# EAGLE board barebones_arduino (EAGLE 5.06)
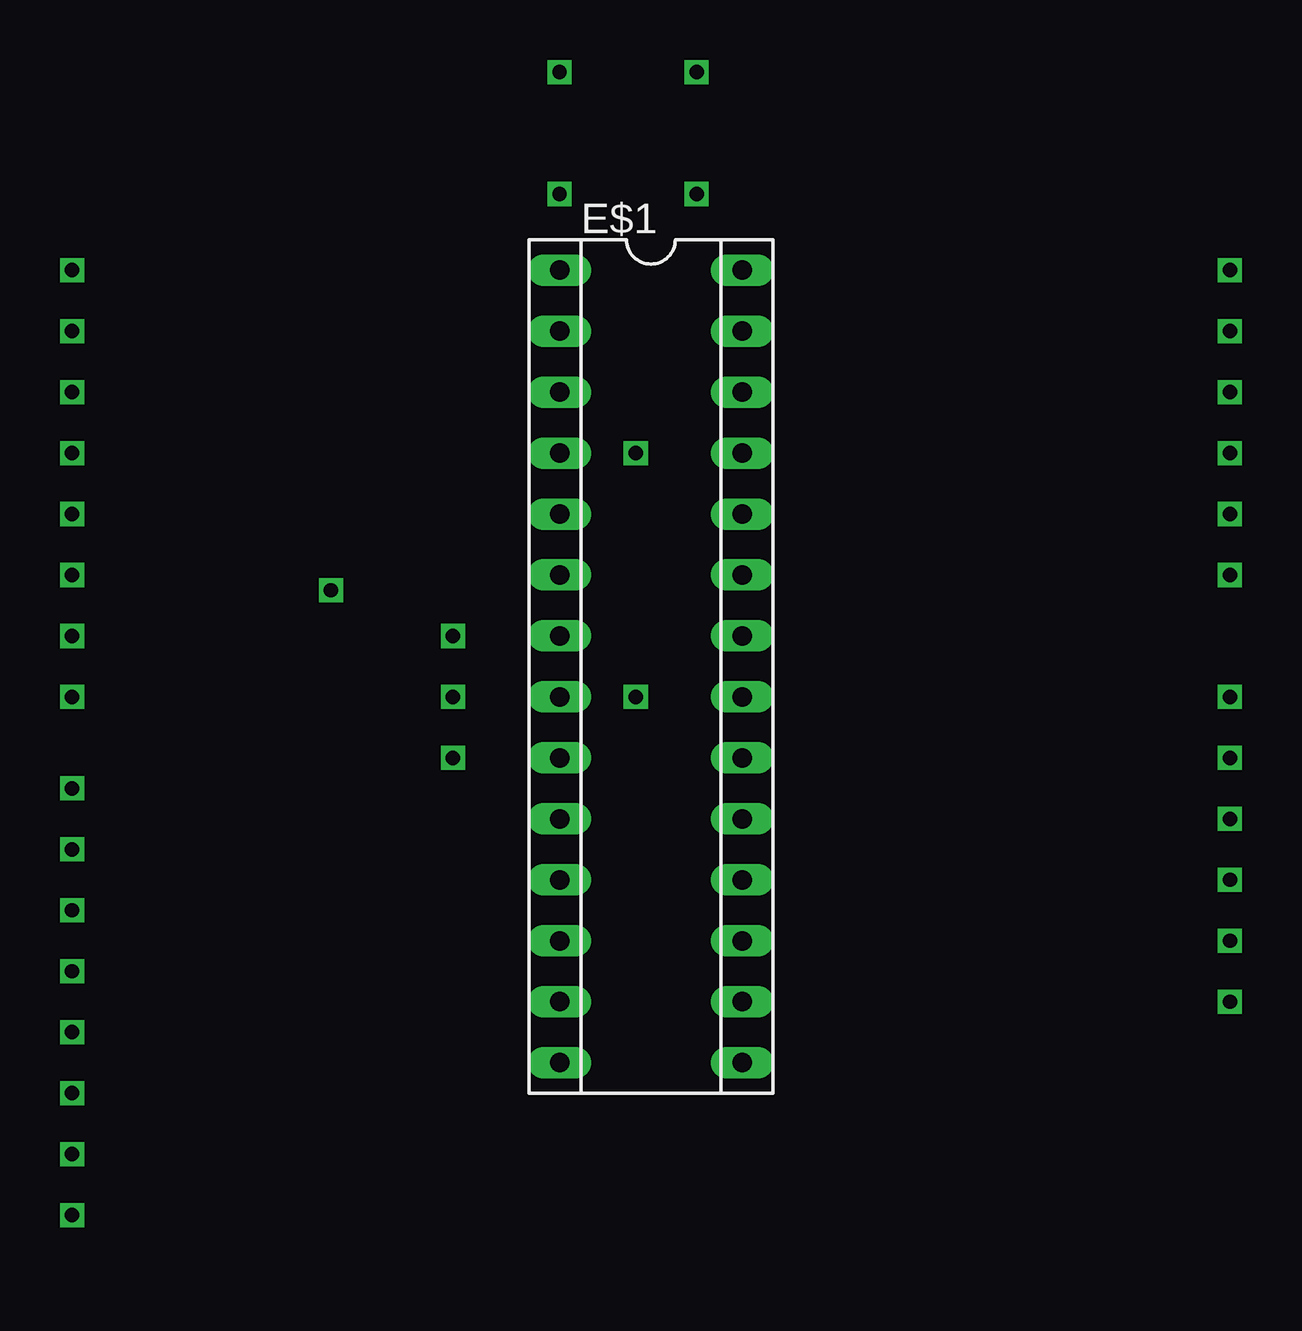
[diagram p0: board, top side]
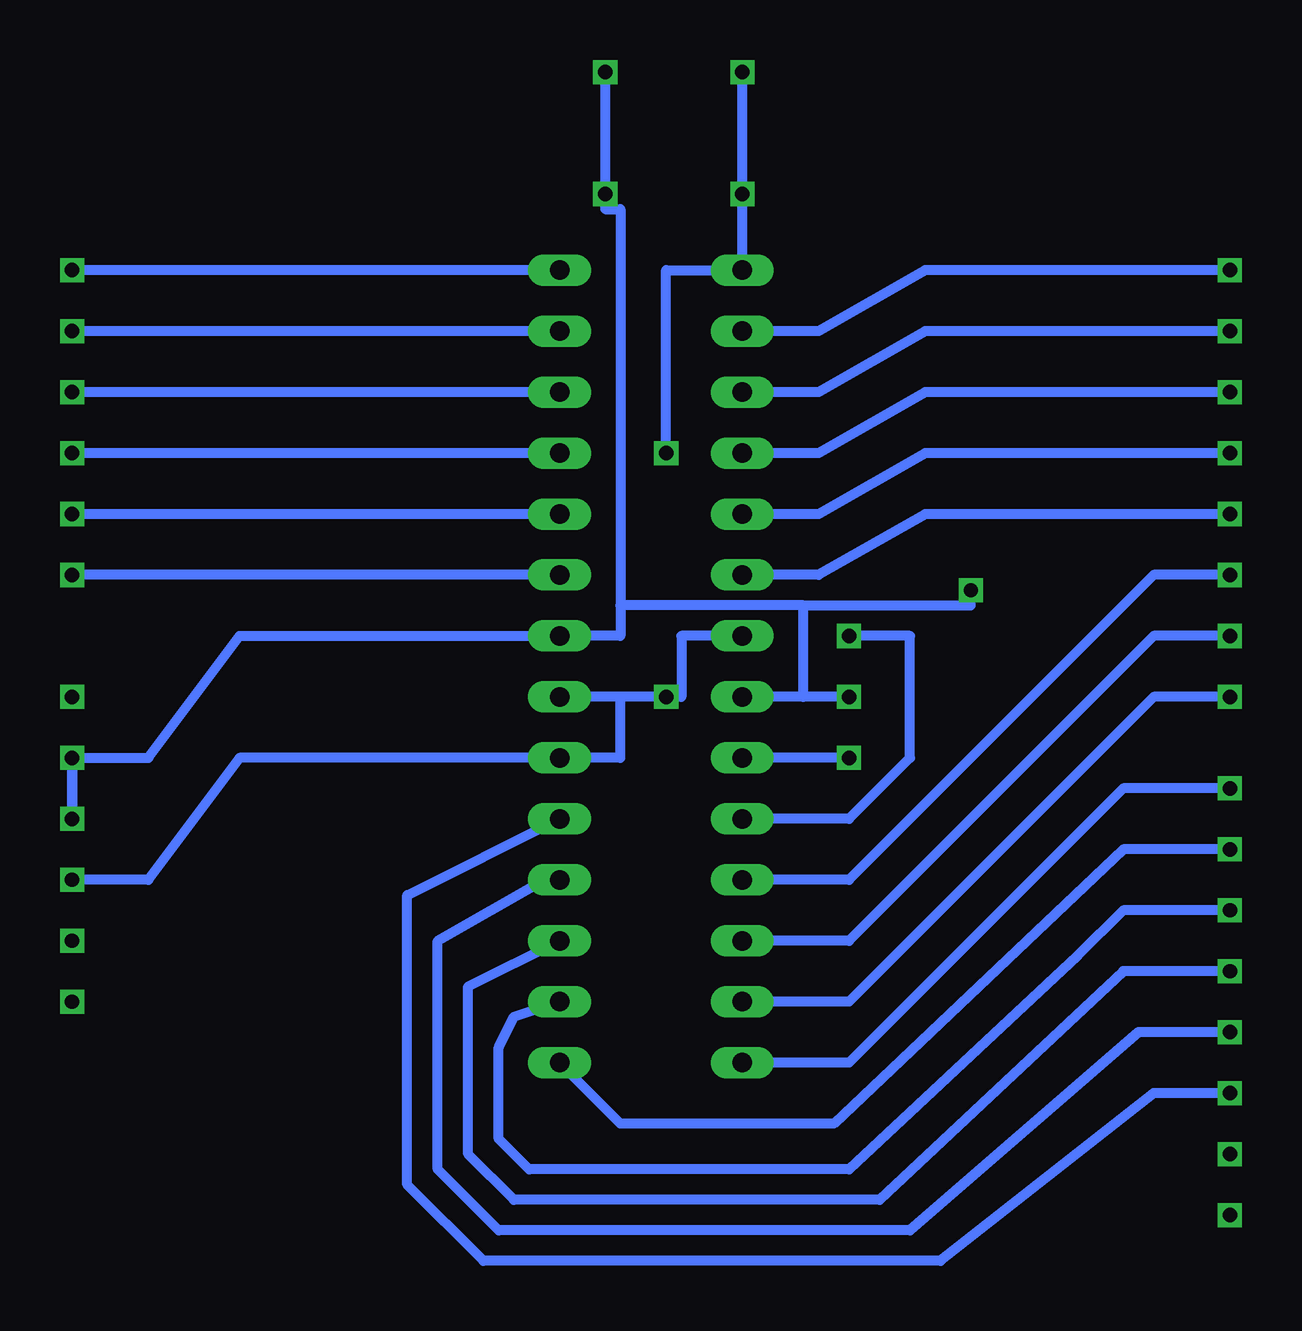
[diagram p1: board, bottom side, seen from below]

No outline drawn. Coordinates in mm, seen from the top.
Copper layers (1*16): Top 0.035mm / dielectric 1.5mm / Bottom 0.035mm
Design rules "default": minimum track width 10mil, minimum drill 24mil, track to track 8mil, track to pad 8mil, pad to pad 8mil, via to via 8mil, smd to smd 8mil, copper to edge 40mil, drill to drill 8mil, minimum pad ring 10mil, minimum via ring 8mil, stop-mask expansion 4mil, vias tented up to drill 0mil, thermal gap 10mil

## Footprints (pad centres in the part's own frame; a part is rotated, then mirrored left to right if it is on the bottom)
SOCKET-28-3 = drill 0.813 long: 1 -16.51,-3.81; 2 -13.97,-3.81; 3 -11.43,-3.81; 4 -8.89,-3.81; 5 -6.35,-3.81; 6 -3.81,-3.81; 7 -1.27,-3.81; 8 1.27,-3.81; 9 3.81,-3.81; 10 6.35,-3.81; 11 8.89,-3.81; 12 11.43,-3.81; 13 13.97,-3.81; 14 16.51,-3.81; 15 16.51,3.81; 16 13.97,3.81; 17 11.43,3.81; 18 8.89,3.81; 19 6.35,3.81; 20 3.81,3.81; 21 1.27,3.81; 22 -1.27,3.81; 23 -3.81,3.81; 24 -6.35,3.81; 25 -8.89,3.81; 26 -11.43,3.81; 27 -13.97,3.81; 28 -16.51,3.81

## Placement (x,y rotation side)
E$1  [SOCKET-28-3]  24.77,23.5 270 top

## Library data of the parts
E$1 = ic-package

## Nets
DP0: E$1.2
DP1: E$1.3
DP2: E$1.4
DP3: E$1.5
DP4: E$1.6
GND: E$1.8 E$1.22
S$1: E$1.11
S$2: E$1.12
S$3: E$1.13
S$4: E$1.14
S$7: E$1.15
S$8: E$1.28
S$9: E$1.25
S$10: E$1.26
S$11: E$1.27
S$12: E$1.24
S$13: E$1.23
S$20: E$1.1
S$29: E$1.16
S$30: E$1.17
S$31: E$1.18
S$32: E$1.19
VCC: E$1.7 E$1.20 E$1.21
XTAL1: E$1.9
XTAL2: E$1.10

## Tracks (layer width: path | path; a pad name or v marks a point on that pad's centre or on a via)
DP0  (via drill 0.6)
  Bottom 0.406: E$1.2 17.78,37.47 13.34,40.01 v0.64,40.01
DP1  (via drill 0.6)
  Bottom 0.406: E$1.3 17.78,34.92 13.34,37.47 v0.64,37.47
DP2  (via drill 0.6)
  Bottom 0.406: E$1.4 17.78,32.38 13.34,34.92 v0.64,34.92
DP3  (via drill 0.6)
  Bottom 0.406: E$1.5 17.78,29.84 13.34,32.38 v0.64,32.38
DP4  (via drill 0.6)
  Bottom 0.406: E$1.6 17.78,27.3 13.34,29.84 v0.64,29.84
GND  (via drill 0.6)
  Bottom 0.406: v16.51,22.23 18.41,22.23 | 18.41,22.23 E$1.8 | 18.41,22.23 18.41,26.04 | 18.41,26.04 26.04,26.04 | 26.04,26.04 26.04,24.77 E$1.22 41.91,24.77 45.72,19.68 v48.9,19.68 | v48.9,19.68 v48.9,17.14 v48.9,19.68 | v26.67,48.26 26.67,42.55 26.04,42.55 26.04,26.04 | 18.41,26.04 11.43,26.04 v11.43,26.67
S$1  (via drill 0.6)
  Bottom 0.406: E$1.11 16.51,14.61 3.81,27.3 v0.64,27.3
S$2  (via drill 0.6)
  Bottom 0.406: E$1.12 16.51,12.06 3.81,24.77 v0.64,24.77
S$3  (via drill 0.6)
  Bottom 0.406: E$1.13 16.51,9.53 3.81,22.23 v0.64,22.23
S$4  (via drill 0.6)
  Bottom 0.406: E$1.14 16.51,6.99 5.08,18.41 v0.64,18.41
S$5  (via drill 0.6)
  other vias: 20.95,43.18
S$6  (via drill 0.6)
  other vias: 26.67,43.18
S$7  (via drill 0.6)
  Bottom 0.406: E$1.15 26.04,4.45 17.14,4.45 5.08,15.88 v0.64,15.88
S$8  (via drill 0.6)
  Bottom 0.406: E$1.28 v48.9,40.01
S$9  (via drill 0.6)
  Bottom 0.406: E$1.25 v48.9,32.38
S$10  (via drill 0.6)
  Bottom 0.406: E$1.26 v48.9,34.92
S$11  (via drill 0.6)
  Bottom 0.406: E$1.27 v48.9,37.47
S$12  (via drill 0.6)
  Bottom 0.406: E$1.24 v48.9,29.84
S$13  (via drill 0.6)
  Bottom 0.406: E$1.23 v48.9,27.3
S$14  (via drill 0.6)
  other vias: 48.9,22.23
S$18  (via drill 0.6)
  other vias: 48.9,12.06
S$19  (via drill 0.6)
  other vias: 48.9,9.53
S$20  (via drill 0.6)
  Bottom 0.406: v24.13,32.38 24.13,40.01 E$1.1 v20.95,48.26
S$27  (via drill 0.6)
  other vias: 0.64,3.17
S$28  (via drill 0.6)
  other vias: 0.64,0.64
S$29  (via drill 0.6)
  Bottom 0.406: E$1.16 30.48,8.89 31.11,7.62 31.11,3.81 29.84,2.54 16.51,2.54 6.99,11.43 5.08,13.34 v0.64,13.34
S$30  (via drill 0.6)
  Bottom 0.406: E$1.17 32.38,10.16 32.38,3.17 30.48,1.27 15.24,1.27 5.08,10.79 v0.64,10.79
S$31  (via drill 0.6)
  Bottom 0.406: E$1.18 29.21,14.61 33.66,12.06 33.66,2.54 31.11,0 13.97,0 4.45,8.26 v0.64,8.26
S$32  (via drill 0.6)
  Bottom 0.406: E$1.19 34.92,13.97 34.92,1.91 31.75,-1.27 12.7,-1.27 3.81,5.71 v0.64,5.71
VCC  (via drill 0.6)
  Bottom 0.406: 26.04,22.23 E$1.21 | 26.04,22.23 26.04,19.68 E$1.20 41.91,19.68 45.72,14.61 v48.9,14.61 | E$1.7 23.5,24.77 23.5,22.23 v24.13,22.23 26.04,22.23
XTAL1  (via drill 0.6)
  Bottom 0.406: v16.51,19.68 E$1.9
XTAL2  (via drill 0.6)
  Bottom 0.406: E$1.10 16.51,17.14 13.97,19.68 13.97,24.77 v16.51,24.77